# Altium PCB JLC_SMT_DEMO_PCB_0.PcbDoc
Units mm, origin at the board's own origin, x right, y up, seen from the top; angles counter-clockwise.
Board outline 180 x 60 mm, 2 copper layers (Top Layer, Bottom Layer); 160 components, 0 nets, 320 pads, 0 vias.
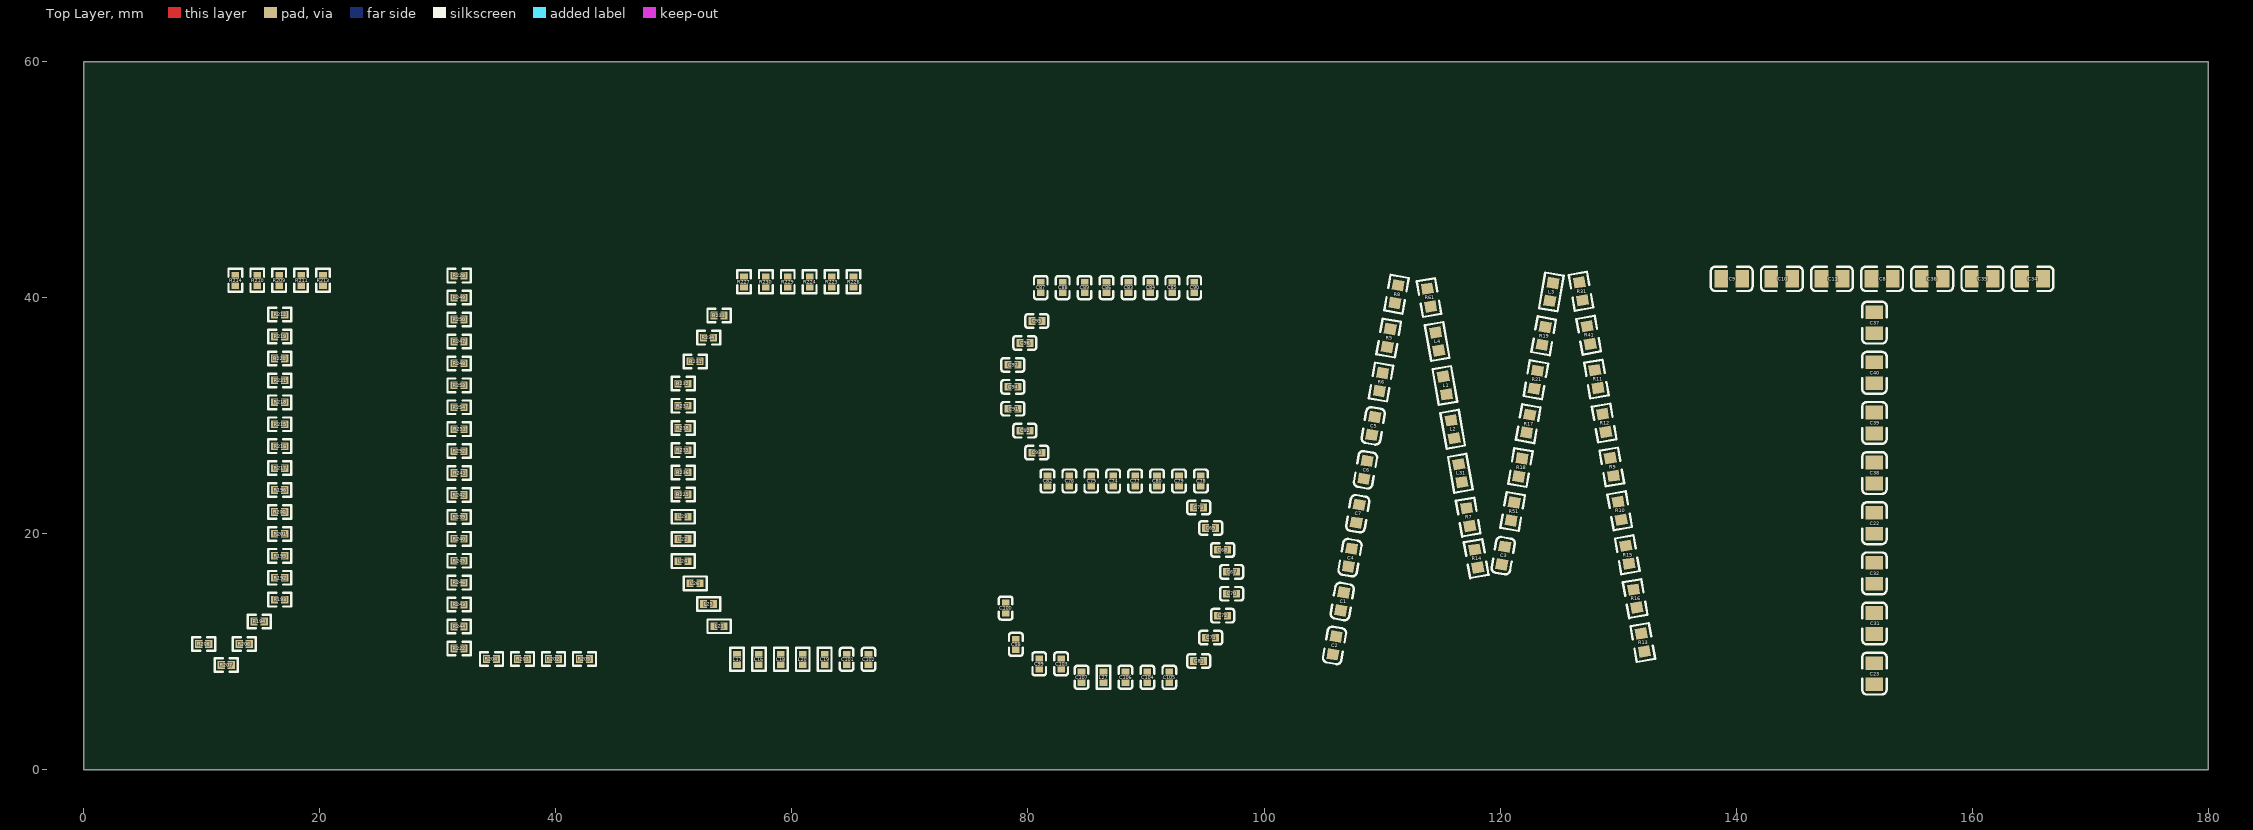
[diagram p0: Top Layer view]
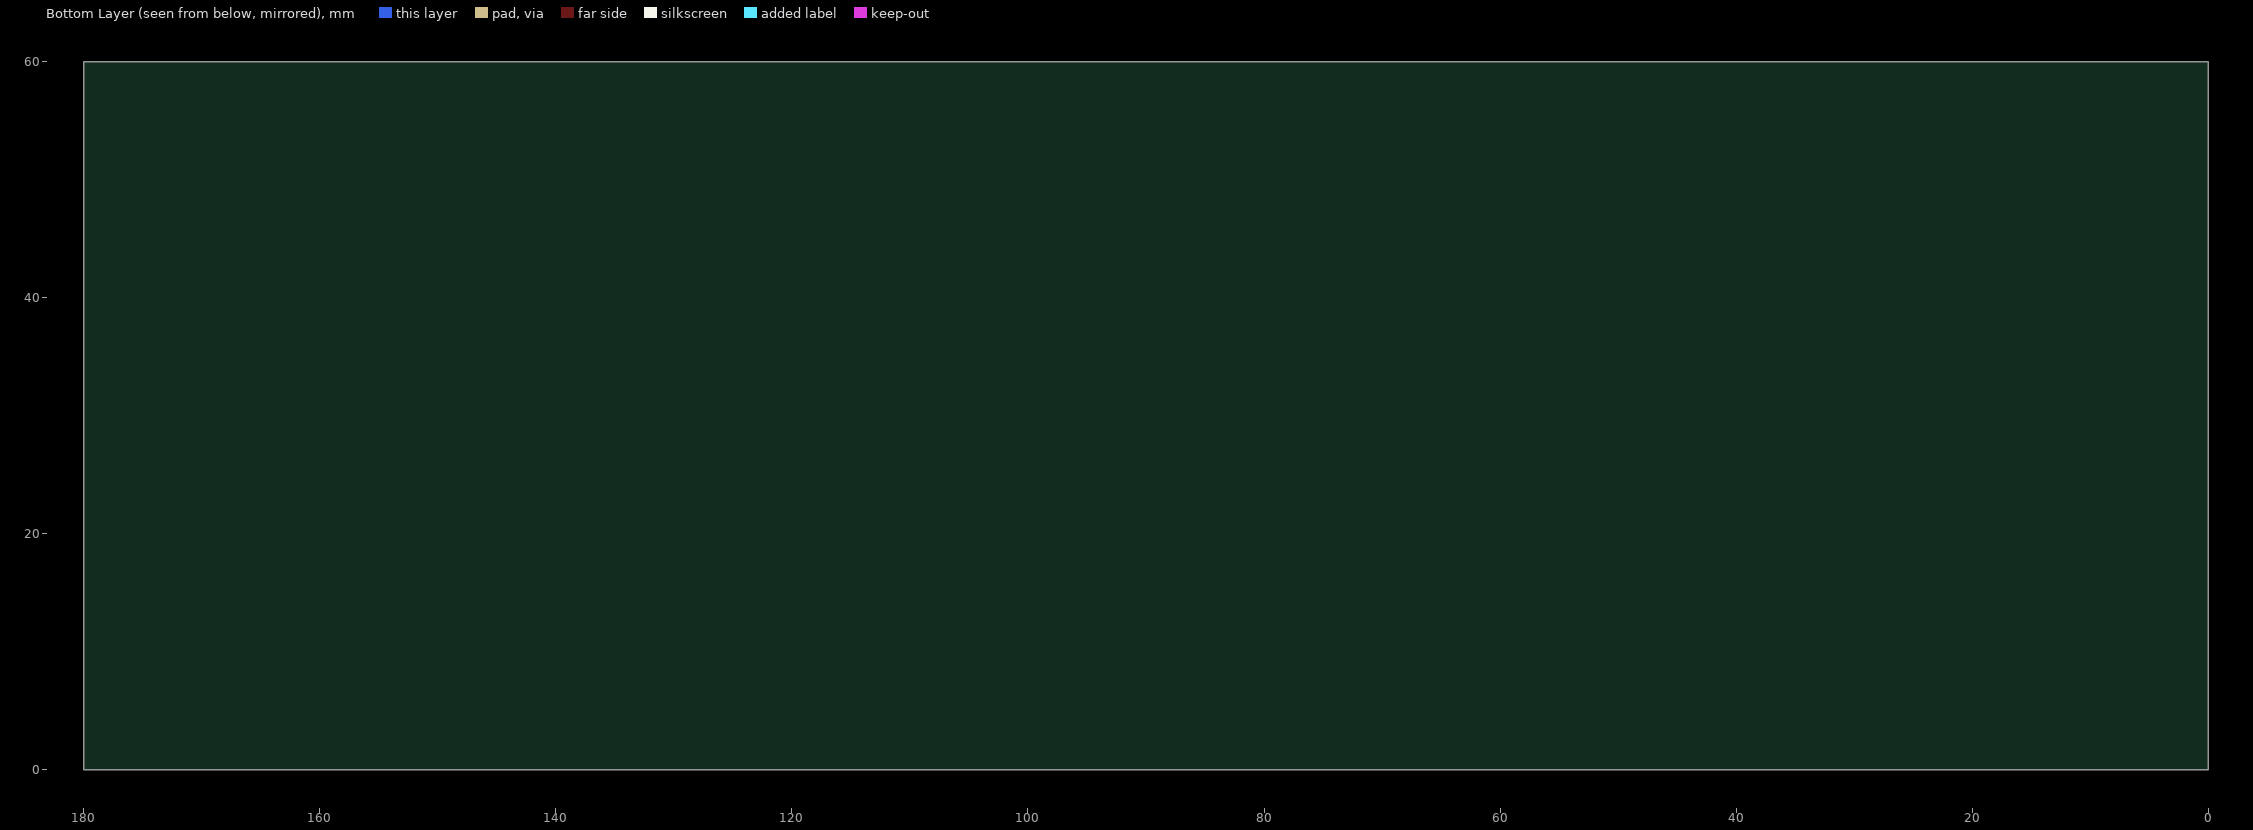
[diagram p1: Bottom Layer view, seen from below]

## Layer stack, top to bottom
Top Solder: solder mask 0.0102, Solder Resist, Dk 3.5
Top Layer: signal copper 0.0356
Dielectric 1: dielectric 0.32, FR-4, Dk 4.8
Bottom Layer: signal copper 0.0356
Bottom Solder: solder mask 0.0102, Solder Resist, Dk 3.5

## Board outline
0,0 0,60 180,60 180,0

## Design rules (kind name [scope] priority, off if disabled: settings)
Clearance [All] p1: gap=0.254
PolygonConnect [All] p1: connectstyle=Relief reliefconductorwidth=0.254 reliefentries=4 polygonreliefangle="90 Angle" airgapwidth=0.254
RoutingVias [All] p1: holewidth=0.711 width=1.27 viastyle="Through Hole" minholewidth=0.711 minwidth=1.27 maxholewidth=0.711 maxwidth=1.27
SolderMaskExpansion [All] p1: expansion=0.102
UnpouredPolygon [All] p1: allowunpoured=FALSE
Width [All] p1: maxlimit=0.254 minlimit=0.254 preferedwidth=0.254
29 further rules are at their usual default settings.

## Components (designator, comment, footprint, x,y, rotation, side; value= is the part's Value field where it differs from the comment)
C1 "10nF (103) 10% 50V" LC-0603_C 106.631,14.272 r80 top
C2 "10nF (103) 10% 50V" LC-0603_C 105.975,10.551 r80 top
C3 "10nF (103) 10% 50V" LC-0603_C 120.269,18.161 r80 top
C4 "10nF (103) 10% 50V" LC-0603_C 107.287,17.993 r80 top
C5 "10nF (103) 10% 50V" LC-0603_C 109.255,29.155 r80 top
C6 "10nF (103) 10% 50V" LC-0603_C 108.599,25.434 r80 top
C7 "10nF (103) 10% 50V" LC-0603_C 107.943,21.713 r80 top
C8 "1.5nF (152) 10% 50V" LC-0805_C 152.372,41.613 r0 top
C9 "1.5nF (152) 10% 50V" LC-0805_C 139.628,41.613 r0 top
C10 "1.5nF (152) 10% 50V" LC-0805_C 143.876,41.613 r0 top
C11 "1.5nF (152) 10% 50V" LC-0805_C 148.124,41.613 r0 top
C22 "1.5nF (152) 10% 50V" LC-0805_C 151.722,20.908 r270 top
C23 "1.5nF (152) 10% 50V" LC-0805_C 151.722,8.163 r270 top
C31 "1.5nF (152) 10% 50V" LC-0805_C 151.722,12.411 r270 top
C32 "1.5nF (152) 10% 50V" LC-0805_C 151.722,16.66 r270 top
C34 "1.5nF (152) 10% 50V" LC-0805_C 165.116,41.613 r0 top
C35 "1.5nF (152) 10% 50V" LC-0805_C 160.868,41.613 r0 top
C36 "1.5nF (152) 10% 50V" LC-0805_C 156.62,41.613 r0 top
C37 "1.5nF (152) 10% 50V" LC-0805_C 151.722,37.9 r270 top
C38 "1.5nF (152) 10% 50V" LC-0805_C 151.722,25.156 r270 top
C39 "1.5nF (152) 10% 50V" LC-0805_C 151.722,29.404 r270 top
C40 "1.5nF (152) 10% 50V" LC-0805_C 151.722,33.652 r270 top
C67 "100nF (104) ±10% 16V" LC-0402_C 97.259,16.787 r180 top
C68 "100nF (104) ±10% 16V" LC-0402_C 96.497,18.645 r180 top
C69 "100nF (104) ±10% 16V" LC-0402_C 95.481,20.503 r180 top
C70 "100nF (104) ±10% 16V" LC-0402_C 97.259,14.929 r180 top
C71 "100nF (104) ±10% 16V" LC-0402_C 95.481,11.213 r180 top
C72 "100nF (104) ±10% 16V" LC-0402_C 96.497,13.071 r180 top
C73 "100nF (104) ±10% 16V" LC-0402_C 94.465,22.234 r180 top
C74 "100nF (104) ±10% 16V" LC-0402_C 87.221,24.488 r270 top
C75 "100nF (104) ±10% 16V" LC-0402_C 85.363,24.488 r270 top
C76 "100nF (104) ±10% 16V" LC-0402_C 83.505,24.488 r270 top
C77 "100nF (104) ±10% 16V" LC-0402_C 89.079,24.488 r270 top
C78 "100nF (104) ±10% 16V" LC-0402_C 94.653,24.488 r270 top
C79 "100nF (104) ±10% 16V" LC-0402_C 92.795,24.488 r270 top
C80 "100nF (104) ±10% 16V" LC-0402_C 90.937,24.488 r270 top
C81 "100nF (104) ±10% 16V" LC-0402_C 94.465,9.228 r180 top
C82 "100nF (104) ±10% 16V" LC-0402_C 81.647,24.488 r270 top
C83 "100nF (104) ±10% 16V" LC-0402_C 88.514,40.871 r270 top
C84 "100nF (104) ±10% 16V" LC-0402_C 90.372,40.871 r270 top
C85 "100nF (104) ±10% 16V" LC-0402_C 92.23,40.871 r270 top
C86 "100nF (104) ±10% 16V" LC-0402_C 86.656,40.871 r270 top
C87 "100nF (104) ±10% 16V" LC-0402_C 81.082,40.871 r270 top
C88 "100nF (104) ±10% 16V" LC-0402_C 82.94,40.871 r270 top
C89 "100nF (104) ±10% 16V" LC-0402_C 84.798,40.871 r270 top
C90 "100nF (104) ±10% 16V" LC-0402_C 94.088,40.871 r270 top
C91 "100nF (104) ±10% 16V" LC-0402_C 78.717,30.607 r180 top
C92 "100nF (104) ±10% 16V" LC-0402_C 79.733,28.749 r180 top
C93 "100nF (104) ±10% 16V" LC-0402_C 80.749,26.891 r180 top
C94 "100nF (104) ±10% 16V" LC-0402_C 78.717,32.465 r180 top
C95 "100nF (104) ±10% 16V" LC-0402_C 80.749,38.039 r180 top
C96 "100nF (104) ±10% 16V" LC-0402_C 79.733,36.181 r180 top
C97 "100nF (104) ±10% 16V" LC-0402_C 78.717,34.323 r180 top
C98 "100nF (104) ±10% 16V" LC-0402_C 78.967,10.645 r270 top
C99 "100nF (104) ±10% 16V" LC-0402_C 80.952,8.994 r270 top
C100 "100nF (104) ±10% 16V" LC-0402_C 78.105,13.716 r270 top
C101 "100nF (104) ±10% 16V" LC-0402_C 64.63,9.375 r270 top
C102 "100nF (104) ±10% 16V" LC-0402_C 66.488,9.375 r270 top
C103 "100nF (104) ±10% 16V" LC-0402_C 82.81,8.994 r270 top
C104 "100nF (104) ±10% 16V" LC-0402_C 90.115,7.851 r270 top
C105 "100nF (104) ±10% 16V" LC-0402_C 91.973,7.851 r270 top
C106 "100nF (104) ±10% 16V" LC-0402_C 88.257,7.851 r270 top
C107 "100nF (104) ±10% 16V" LC-0402_C 84.541,7.851 r270 top
L1 "4.7uH ±10%" LC-0603_L 115.327,32.586 r100 top
L2 "47nH" LC-0603_L 115.983,28.865 r100 top
L3 "68nH ±5% 0603" LC-0603_L 124.351,40.506 r260 top
L4 "4.7uH ±10%" LC-0603_L 114.671,36.306 r100 top
L16 "10nH ±5%" LC-0402_L 57.198,9.375 r270 top
L17 "10nH ±5%" LC-0402_L 55.34,9.375 r270 top
L18 "10nH ±5%" LC-0402_L 59.056,9.375 r270 top
L19 "10nH ±5%" LC-0402_L 62.772,9.375 r270 top
L20 "10nH ±5%" LC-0402_L 60.914,9.375 r270 top
L21 "10nH ±5%" LC-0402_L 53.825,12.177 r180 top
L22 "10nH ±5%" LC-0402_L 50.777,19.573 r180 top
L23 "10nH ±5%" LC-0402_L 50.777,21.454 r180 top
L24 "10nH ±5%" LC-0402_L 50.777,17.692 r180 top
L25 "10nH ±5%" LC-0402_L 52.936,14.058 r180 top
L26 "10nH ±5%" LC-0402_L 51.793,15.812 r180 top
L27 "10nH ±5%" LC-0402_L 86.399,7.851 r270 top
L31 "22nH ±5%" LC-0603_L 116.639,25.144 r100 top
R5 "13KΩ (1302) ±1%" LC-0603_R 110.567,36.596 r80 top
R6 "13KΩ (1302) ±1%" LC-0603_R 109.911,32.875 r80 top
R7 "13KΩ (1302) ±1%" LC-0603_R 117.295,21.424 r100 top
R8 "13KΩ (1302) ±1%" LC-0603_R 111.223,40.316 r80 top
R9 "13KΩ (1302) ±1%" LC-0603_R 129.479,25.679 r280 top
R10 "13KΩ (1302) ±1%" LC-0603_R 130.135,21.959 r280 top
R11 "13KΩ (1302) ±1%" LC-0603_R 128.167,33.121 r280 top
R12 "13KΩ (1302) ±1%" LC-0603_R 128.823,29.4 r280 top
R13 "13KΩ (1302) ±1%" LC-0603_R 132.103,10.797 r280 top
R14 "13KΩ (1302) ±1%" LC-0603_R 117.983,17.907 r280 top
R15 "13KΩ (1302) ±1%" LC-0603_R 130.791,18.238 r280 top
R16 "13KΩ (1302) ±1%" LC-0603_R 131.447,14.518 r280 top
R17 "13KΩ (1302) ±1%" LC-0603_R 122.383,29.344 r260 top
R18 "13KΩ (1302) ±1%" LC-0603_R 121.727,25.623 r260 top
R19 "13KΩ (1302) ±1%" LC-0603_R 123.695,36.785 r260 top
R21 "13KΩ (1302) ±1%" LC-0603_R 123.039,33.065 r260 top
R31 "13KΩ (1302) ±1%" LC-0603_R 126.854,40.562 r280 top
R41 "13KΩ (1302) ±1%" LC-0603_R 127.51,36.841 r280 top
R51 "13KΩ (1302) ±1%" LC-0603_R 121.071,21.903 r260 top
R61 "13KΩ (1302) ±1%" LC-0603_R 113.98,40.025 r100 top
R192 "300Ω (3000) ±1%" LC-0402_R 16.594,16.287 r0 top
R193 "300Ω (3000) ±1%" LC-0402_R 16.594,14.429 r0 top
R194 "300Ω (3000) ±1%" LC-0402_R 14.859,12.573 r0 top
R195 "300Ω (3000) ±1%" LC-0402_R 16.594,18.145 r0 top
R196 "300Ω (3000) ±1%" LC-0402_R 16.594,23.719 r0 top
R200 "300Ω (3000) ±1%" LC-0402_R 16.594,21.861 r0 top
R201 "300Ω (3000) ±1%" LC-0402_R 16.594,20.003 r0 top
R202 "300Ω (3000) ±1%" LC-0402_R 39.793,9.398 r0 top
R203 "300Ω (3000) ±1%" LC-0402_R 37.169,9.398 r0 top
R204 "300Ω (3000) ±1%" LC-0402_R 34.544,9.398 r0 top
R205 "300Ω (3000) ±1%" LC-0402_R 42.418,9.398 r0 top
R206 "300Ω (3000) ±1%" LC-0402_R 13.589,10.668 r0 top
R207 "300Ω (3000) ±1%" LC-0402_R 12.065,8.89 r0 top
R208 "300Ω (3000) ±1%" LC-0402_R 10.16,10.668 r0 top
R209 "300Ω (3000) ±1%" LC-0402_R 16.549,41.486 r90 top
R210 "300Ω (3000) ±1%" LC-0402_R 14.691,41.486 r90 top
R211 "300Ω (3000) ±1%" LC-0402_R 18.407,41.486 r90 top
R212 "300Ω (3000) ±1%" LC-0402_R 16.594,38.583 r0 top
R213 "300Ω (3000) ±1%" LC-0402_R 20.265,41.486 r90 top
R214 "300Ω (3000) ±1%" LC-0402_R 12.833,41.486 r90 top
R215 "300Ω (3000) ±1%" LC-0402_R 16.594,29.293 r0 top
R216 "300Ω (3000) ±1%" LC-0402_R 16.594,27.435 r0 top
R217 "300Ω (3000) ±1%" LC-0402_R 16.594,25.577 r0 top
R218 "300Ω (3000) ±1%" LC-0402_R 16.594,31.151 r0 top
R219 "300Ω (3000) ±1%" LC-0402_R 16.594,36.725 r0 top
R220 "300Ω (3000) ±1%" LC-0402_R 16.594,34.867 r0 top
R221 "300Ω (3000) ±1%" LC-0402_R 16.594,33.009 r0 top
R222 "300Ω (3000) ±1%" LC-0402_R 31.793,10.294 r180 top
R223 "300Ω (3000) ±1%" LC-0402_R 63.362,41.359 r90 top
R224 "300Ω (3000) ±1%" LC-0402_R 61.504,41.359 r90 top
R225 "300Ω (3000) ±1%" LC-0402_R 50.777,23.335 r180 top
R226 "300Ω (3000) ±1%" LC-0402_R 65.22,41.359 r90 top
R227 "300Ω (3000) ±1%" LC-0402_R 55.93,41.359 r90 top
R228 "300Ω (3000) ±1%" LC-0402_R 31.793,41.88 r180 top
R229 "300Ω (3000) ±1%" LC-0402_R 59.646,41.359 r90 top
R230 "300Ω (3000) ±1%" LC-0402_R 57.788,41.359 r90 top
R231 "300Ω (3000) ±1%" LC-0402_R 51.793,34.619 r180 top
R232 "300Ω (3000) ±1%" LC-0402_R 50.777,32.739 r180 top
R233 "300Ω (3000) ±1%" LC-0402_R 53.825,38.508 r180 top
R234 "300Ω (3000) ±1%" LC-0402_R 52.936,36.627 r180 top
R235 "300Ω (3000) ±1%" LC-0402_R 50.777,27.096 r180 top
R236 "300Ω (3000) ±1%" LC-0402_R 50.777,25.216 r180 top
R237 "300Ω (3000) ±1%" LC-0402_R 50.777,30.858 r180 top
R238 "300Ω (3000) ±1%" LC-0402_R 50.777,28.977 r180 top
R239 "300Ω (3000) ±1%" LC-0402_R 31.793,21.442 r180 top
R240 "300Ω (3000) ±1%" LC-0402_R 31.793,19.584 r180 top
R241 "300Ω (3000) ±1%" LC-0402_R 31.793,25.158 r180 top
R242 "300Ω (3000) ±1%" LC-0402_R 31.793,23.3 r180 top
R243 "300Ω (3000) ±1%" LC-0402_R 31.793,14.01 r180 top
R244 "300Ω (3000) ±1%" LC-0402_R 31.793,12.152 r180 top
R245 "300Ω (3000) ±1%" LC-0402_R 31.793,17.726 r180 top
R246 "300Ω (3000) ±1%" LC-0402_R 31.793,15.868 r180 top
R247 "300Ω (3000) ±1%" LC-0402_R 31.793,36.306 r180 top
R248 "300Ω (3000) ±1%" LC-0402_R 31.793,34.448 r180 top
R249 "300Ω (3000) ±1%" LC-0402_R 31.793,40.022 r180 top
R250 "300Ω (3000) ±1%" LC-0402_R 31.793,38.164 r180 top
R251 "300Ω (3000) ±1%" LC-0402_R 31.793,28.874 r180 top
R252 "300Ω (3000) ±1%" LC-0402_R 31.793,27.016 r180 top
R253 "300Ω (3000) ±1%" LC-0402_R 31.793,32.59 r180 top
R254 "300Ω (3000) ±1%" LC-0402_R 31.793,30.732 r180 top

## Footprints (in the part's own frame and the unit in brackets; to place one, negate y for a bottom-side part, rotate by r counter-clockwise, add the part's x,y. Pads: shape width x height; smd on the part's side, far side on the other; paste and mask are expansions set on the pad)
LC-0402_C [mm]
  rect 0.6x0.65 smd mask+0.051: 1(-0.425,0) 2(0.425,0)
  silkscreen extent -0.97,-0.58 0.97,0.58, body extent -0.48,-0.3 0.52,0.3, height 0.2
LC-0402_L [mm]
  rect 0.6x0.65 smd mask+0.051: 1(-0.425,0) 2(0.425,0)
  silkscreen extent -0.97,-0.58 0.97,0.58, body extent -0.51,-0.26 0.54,0.26, height 0.36
LC-0402_R [mm]
  rect 0.6x0.65 smd mask+0.051: 1(-0.425,0) 2(0.425,0)
  silkscreen extent -0.97,-0.58 0.97,0.58, body extent -0.57,-0.27 0.58,0.28, height 0.41
LC-0603_C [mm]
  rect 0.93x0.98 smd: 1(-0.77,0) 2(0.77,0)
  silkscreen extent -1.53,-0.79 1.54,0.79, body extent -0.8,-0.4 0.8,0.4, height 0.3
LC-0603_L [mm]
  rect 0.93x0.98 smd: 1(-0.77,0) 2(0.77,0)
  silkscreen extent -1.53,-0.79 1.54,0.79, body extent -0.82,-0.41 0.83,0.41, height 0.46
LC-0603_R [mm]
  rect 0.93x0.98 smd: 1(-0.77,0) 2(0.77,0)
  silkscreen extent -1.54,-0.79 1.54,0.79, body extent -0.85,-0.4 0.85,0.4, height 0.56
LC-0805_C [mm]
  rect 1.16x1.47 smd: 1(-0.89,0) 2(0.89,0)
  silkscreen extent -1.77,-1.04 1.77,1.04, body extent -1,-0.62 1,0.63, height 0.77

## Part data
C1: library part "0603 680pF (681) 10% 50V", "贴片电容"
C2: library part "0603 68nF (683) 10% 50V", "贴片电容"
C3: library part "0603 68pF (680) 5% 50V", "贴片电容"
C4: library part "0603 6pF (6R0) 0.25pF 50V", "贴片电容"
C5: library part "0603 8.2nF (822) 10% 50V", "贴片电容"
C6: library part "0603 8.2pF (8R2) 0.25pF 50V", "贴片电容"
C7: library part "0603 82pF (820) 5% 50V", "贴片电容"
C8: library part "0805 1.0pF (010) 0.25pF 50V", "贴片电容"
C9: library part "0805 1.5nF (152) 10% 50V", "贴片电容"
C10: library part "0805 1.5pF (1R5) 0.25pF 50V", "贴片电容"
C11: library part "0805 100nF(104) 10% 50V", "贴片电容"
C22: library part "0805 2.0pF (2R0) 0.25pF 50V", "贴片电容"
C23: library part "0805 2.2nF (222) 5% 50V", "贴片电容"
C31: library part "0805 22pF (220) 5% 50V", "贴片电容"
C32: library part "0805 22uF (226) 20% 25V", "贴片电容"
C34: library part "0805 3.3nF (332) 10% 50V", "贴片电容"
C35: library part "0805 30pF (300) 5% 50V", "贴片电容"
C36: library part "0805 330nF (334) 10% 50V", "贴片电容"
C37: library part "0805 330pF (331) 10% 50V", "贴片电容"
C38: library part "0805 33nF (333) 10% 50V", "贴片电容"
C39: library part "0805 33pF (330) 5% 50V", "贴片电容"
C40: library part "0805 4.7nF (472) 10% 50V", "贴片电容"
C67: library part "0402 1.0uF (105) 10% 25V", "贴片电容"
C68: library part "0402 1.5nF (152) 10% 50V", "贴片电容"
C69: library part "0402 1.5pF (1R5) 0.25pF 50V", "贴片电容"
C70: library part "0402 100nF (104) 10% 16V", "贴片电容"
C71: library part "0402 100pF (101) 5% 50V", "贴片电容"
C72: library part "0402 10nF (103) 10% 50V", "贴片电容"
C73: library part "0402 10pF (100) 5% 50V", "贴片电容"
C74: library part "0402 10uF (106) 20% 6.3V", "贴片电容"
C75: library part "0402 12pF (120) 5% 50V", "贴片电容"
C76: library part "0402 150pF (151) 10% 50V", "贴片电容"
C77: library part "0402 15pF (150) 5% 50V", "贴片电容"
C78: library part "0402 18pF (180) 5% 50V", "贴片电容"
C79: library part "0402 1nF (102) 10% 50V", "贴片电容"
C80: library part "0402 1pF (1R0) 0.25pF 50V", "贴片电容"
C81: library part "0402 2.0pF (2R0) 0.25pF 50V", "贴片电容"
C82: library part "0402 2.2nF (222) 10% 50V", "贴片电容"
C83: library part "0402 2.2pF (2R2) 0.25pF 50V", "贴片电容"
C84: library part "0402 2.7pF (2R7) 0.25pF 50V", "贴片电容"
C85: library part "0402 20pF (200) 5% 50V", "贴片电容"
C86: library part "0402 220nF (224) 10% 16V", "贴片电容"
C87: library part "0402 220pF (221) 10% 50V", "贴片电容"
C88: library part "0402 22nF (223) 10% 50V", "贴片电容"
C89: library part "0402 22pF (220) 5% 50V", "贴片电容"
C90: library part "0402 27pF (270) 5% 50V", "贴片电容"
C91: library part "0402 3.3nF (332) 10% 50V", "贴片电容"
C92: library part "0402 3.3pF (3R3) 0.25pF 50V", "贴片电容"
C93: library part "0402 30pF (300) 5% 50V", "贴片电容"
C94: library part "0402 330pF (331) 5% 50V", "贴片电容"
C95: library part "0402 33nF (333) 20% 50V", "贴片电容"
C96: library part "0402 33pF (330) 5% 50V", "贴片电容"
C97: library part "0402 4.7nF (472) 10% 50V", "贴片电容"
C98: library part "0402 4.7pF (4R7) 0.25pF 50V", "贴片电容"
C99: library part "0402 4.7uF (475) 20% 10V", "贴片电容"
C100: library part "0402 470nF (474) 10% 10V", "贴片电容"
C101: library part "0402 470pF (471) 10% 50V", "贴片电容"
C102: library part "0402 47pF (470) 5% 50V", "贴片电容"
C103: library part "0402 56pF (560) 5% 50V", "贴片电容"
C104: library part "0402 6.0pF (6R0) 0.25pF 50V NPO", "贴片电容"
C105: library part "0402 6.8nF (682) 10% 50V", "贴片电容"
C106: library part "0402 6.8pF (6R8) 0.25pF 50V", "贴片电容"
C107: library part "0402 68pF (680) 5% 50V", "贴片电容"
L1: library part "0603 4.7uH 10%", "贴片电感"
L2: library part "0603 47nH", "贴片电感"
L3: library part "0603 68nH 5% 0603", "贴片电感"
L4: library part "0603 8.2nH 5%", "贴片电感"
L16: library part "0402 10nH 5%", "贴片电感"
L17: library part "0402 12nH  5%", "贴片电感"
L18: library part "0402 15nH 5%", "贴片电感"
L19: library part "0402 18nH", "贴片电感"
L20: library part "0402 2.7nH 0.3nH", "贴片电感"
L21: library part "0402 27nH 5%", "贴片电感"
L22: library part "0402 3.3nH 0.3nH", "贴片电感"
L23: library part "0402 3.9nH 3%", "贴片电感"
L24: library part "0402 39nH", "贴片电感"
L25: library part "0402 4.7nH 0.3nH", "贴片电感"
L26: library part "0402 6.8nH 5%", "贴片电感"
L27: library part "0402 8.2nH 5%", "贴片电感"
L31: library part "0603 22nH 5%", "贴片电感"
R5: library part "0603 330KΩ (3303) 1%", "贴片电阻"
R6: library part "0603 330Ω (3300) 1%", "贴片电阻"
R7: library part "0603 33KΩ (3302) 1%", "贴片电阻"
R8: library part "0603 33Ω (33R0) 1%", "贴片电阻"
R9: library part "0603 360KΩ (3603) 1%", "贴片电阻"
R10: library part "0603 360Ω (3600) 1%", "贴片电阻"
R11: library part "0603 36KΩ (3602) 1%", "贴片电阻"
R12: library part "0603 390KΩ (3903) 1%", "贴片电阻"
R13: library part "0603 390Ω (3900) 1%", "贴片电阻"
R14: library part "0603 39KΩ (3902) 1%", "贴片电阻"
R15: library part "0603 3KΩ (3001) 1%", "贴片电阻"
R16: library part "0603 3MΩ (3004) 1%", "贴片电阻"
R17: library part "0603 4.3KΩ (4301) 1%", "贴片电阻"
R18: library part "0603 4.7KΩ (4701) 1%", "贴片电阻"
R19: library part "0603 4.7MΩ (4704) 1%", "贴片电阻"
R21: library part "0603 4.99KΩ (4991) 1%", "贴片电阻"
R31: library part "0603 49.9Ω (49R9) 1%", "贴片电阻"
R41: library part "0603 560Ω (5600) 1%", "贴片电阻"
R51: library part "0603 68KΩ (6802) 1%", "贴片电阻"
R61: library part "0603 82Ω (82R0) 1%", "贴片电阻"
R192: library part "0402 0Ω (0R0) 1%", "贴片电阻"
R193: library part "0402 1.2KΩ (1201) 1%", "贴片电阻"
R194: library part "0402 1.5KΩ (1501) 1%", "贴片电阻"
R195: library part "0402 100KΩ (1003) 1%", "贴片电阻"
R196: library part "0402 100Ω (1000) 1%", "贴片电阻"
R200: library part "0402 10KΩ (1002) 1%", "贴片电阻"
R201: library part "0402 10MΩ (1005) 1%", "贴片电阻"
R202: library part "0402 10Ω (10R0) 1%", "贴片电阻"
R203: library part "0402 120KΩ (1203) 1%", "贴片电阻"
R204: library part "0402 120Ω (1200) 1%", "贴片电阻"
R205: library part "0402 12KΩ (1202) 1%", "贴片电阻"
R206: library part "0402 150KΩ (1503) 1%", "贴片电阻"
R207: library part "0402 150Ω (1500) 1%", "贴片电阻"
R208: library part "0402 15KΩ (1502) 1%", "贴片电阻"
R209: library part "0402 18KΩ (1802) 1%", "贴片电阻"
R210: library part "0402 1KΩ (1001) 1%", "贴片电阻"
R211: library part "0402 1MΩ (1004) 1%", "贴片电阻"
R212: library part "0402 1Ω (1R00) 1%", "贴片电阻"
R213: library part "0402 2.2KΩ (2201) 1%", "贴片电阻"
R214: library part "0402 2.4KΩ (2401) 1%", "贴片电阻"
R215: library part "0402 200KΩ (2003) 1%", "贴片电阻"
R216: library part "0402 200Ω (2000) 1%", "贴片电阻"
R217: library part "0402 20KΩ (2002) 1%", "贴片电阻"
R218: library part "0402 220KΩ (2203) 1%", "贴片电阻"
R219: library part "0402 220Ω (2200) 1%", "贴片电阻"
R220: library part "0402 22KΩ (2202) 1%", "贴片电阻"
R221: library part "0402 22Ω (22R0) 1%", "贴片电阻"
R222: library part "0402 24KΩ (2402) 1%", "贴片电阻"
R223: library part "0402 27KΩ (2702) 1%", "贴片电阻"
R224: library part "0402 2KΩ (2001) 1%", "贴片电阻"
R225: library part "0402 3.3KΩ (3301) 1%", "贴片电阻"
R226: library part "0402 3.9KΩ(3901) 1%", "贴片电阻"
R227: library part "0402 300KΩ (3003) 1%", "贴片电阻"
R228: library part "0402 300Ω (3000) 1%", "贴片电阻"
R229: library part "0402 330KΩ (3303) 1%", "贴片电阻"
R230: library part "0402 330Ω (3300) 1%", "贴片电阻"
R231: library part "0402 33KΩ (3302) 1%", "贴片电阻"
R232: library part "0402 33Ω (33R0) 1%", "贴片电阻"
R233: library part "0402 39KΩ (3902) 1%", "贴片电阻"
R234: library part "0402 4.7KΩ (4701) 1%", "贴片电阻"
R235: library part "0402 470KΩ (4703) 1%", "贴片电阻"
R236: library part "0402 470Ω (4700) 1%", "贴片电阻"
R237: library part "0402 47KΩ (4702) 1%", "贴片电阻"
R238: library part "0402 47Ω (47R0) 1%", "贴片电阻"
R239: library part "0402 49.9KΩ (4992) 1%", "贴片电阻"
R240: library part "0402 49.9Ω (49R9) 1%", "贴片电阻"
R241: library part "0402 5.1KΩ (5101) 1%", "贴片电阻"
R242: library part "0402 5.6KΩ (5601) 1%", "贴片电阻"
R243: library part "0402 510KΩ (5103) 1%", "贴片电阻"
R244: library part "0402 510Ω (5100) 1%", "贴片电阻"
R245: library part "0402 51KΩ (5102) 1%", "贴片电阻"
R246: library part "0402 51Ω (51R0) 1%", "贴片电阻"
R247: library part "0402 56KΩ (5602) 1%", "贴片电阻"
R248: library part "0402 6.8KΩ (6801) 1%", "贴片电阻"
R249: library part "0402 680Ω (6800) 1%", "贴片电阻"
R250: library part "0402 68KΩ (6802) 1%", "贴片电阻"
R251: library part "0402 7.5KΩ (7501) 1%", "贴片电阻"
R252: library part "0402 75KΩ (7502) 1%", "贴片电阻"
R253: library part "0402 75Ω (75R0) 1%", "贴片电阻"
R254: library part "0402 8.2KΩ (8201) 1%", "贴片电阻"

## Nets (pads, with @x,y where several pads share a name; then routed paths per layer and width w, separated by ;. In a path a pad name is that pad's centre, name@x,y a point inside that pad or via, vN(x,y) a via of type N, cw(c..) or ccw(c..) an arc to the next point about the centre after c; other vN are vias at no path point)
pads on no net: C1.1 C1.2 C2.1 C2.2 C3.1 C3.2 C4.1 C4.2 C5.1 C5.2 C6.1 C6.2 C7.1 C7.2 C8.1 C8.2 C9.1 C9.2 C10.1 C10.2 C11.1 C11.2 C22.1 C22.2 C23.1 C23.2 C31.1 C31.2 C32.1 C32.2 C34.1 C34.2 C35.1 C35.2 C36.1 C36.2 C37.1 C37.2 C38.1 C38.2 C39.1 C39.2 C40.1 C40.2 C67.1 C67.2 C68.1 C68.2 C69.1 C69.2 C70.1 C70.2 C71.1 C71.2 C72.1 C72.2 C73.1 C73.2 C74.1 C74.2 C75.1 C75.2 C76.1 C76.2 C77.1 C77.2 C78.1 C78.2 C79.1 C79.2 C80.1 C80.2 C81.1 C81.2 C82.1 C82.2 C83.1 C83.2 C84.1 C84.2 C85.1 C85.2 C86.1 C86.2 C87.1 C87.2 C88.1 C88.2 C89.1 C89.2 C90.1 C90.2 C91.1 C91.2 C92.1 C92.2 C93.1 C93.2 C94.1 C94.2 C95.1 C95.2 C96.1 C96.2 C97.1 C97.2 C98.1 C98.2 C99.1 C99.2 C100.1 C100.2 C101.1 C101.2 C102.1 C102.2 C103.1 C103.2 C104.1 C104.2 C105.1 C105.2 C106.1 C106.2 C107.1 C107.2 L1.1 L1.2 L2.1 L2.2 L3.1 L3.2 L4.1 L4.2 L16.1 L16.2 L17.1 L17.2 L18.1 L18.2 L19.1 L19.2 L20.1 L20.2 L21.1 L21.2 L22.1 L22.2 L23.1 L23.2 L24.1 L24.2 L25.1 L25.2 L26.1 L26.2 L27.1 L27.2 L31.1 L31.2 R5.1 R5.2 R6.1 R6.2 R7.1 R7.2 R8.1 R8.2 R9.1 R9.2 R10.1 R10.2 R11.1 R11.2 R12.1 R12.2 R13.1 R13.2 R14.1 R14.2 R15.1 R15.2 R16.1 R16.2 R17.1 R17.2 R18.1 R18.2 R19.1 R19.2 R21.1 R21.2 R31.1 R31.2 R41.1 R41.2 R51.1 R51.2 R61.1 R61.2 R192.1 R192.2 R193.1 R193.2 R194.1 R194.2 R195.1 R195.2 R196.1 R196.2 R200.1 R200.2 R201.1 R201.2 R202.1 R202.2 R203.1 R203.2 R204.1 R204.2 R205.1 R205.2 R206.1 R206.2 R207.1 R207.2 R208.1 R208.2 R209.1 R209.2 R210.1 R210.2 R211.1 R211.2 R212.1 R212.2 R213.1 R213.2 R214.1 R214.2 R215.1 R215.2 R216.1 R216.2 R217.1 R217.2 R218.1 R218.2 R219.1 R219.2 R220.1 R220.2 R221.1 R221.2 R222.1 R222.2 R223.1 R223.2 R224.1 R224.2 R225.1 R225.2 R226.1 R226.2 R227.1 R227.2 R228.1 R228.2 R229.1 R229.2 R230.1 R230.2 R231.1 R231.2 R232.1 R232.2 R233.1 R233.2 R234.1 R234.2 R235.1 R235.2 R236.1 R236.2 R237.1 R237.2 R238.1 R238.2 R239.1 R239.2 R240.1 R240.2 R241.1 R241.2 R242.1 R242.2 R243.1 R243.2 R244.1 R244.2 R245.1 R245.2 R246.1 R246.2 R247.1 R247.2 R248.1 R248.2 R249.1 R249.2 R250.1 R250.2 R251.1 R251.2 R252.1 R252.2 R253.1 R253.2 R254.1 R254.2

## Silkscreen, mask and mechanical layers (free items; w line width, h text height)
Mechanical 1:
  the board outline again, w0.254